# EAGLE board picoAvaR9 (EAGLE 6.1)
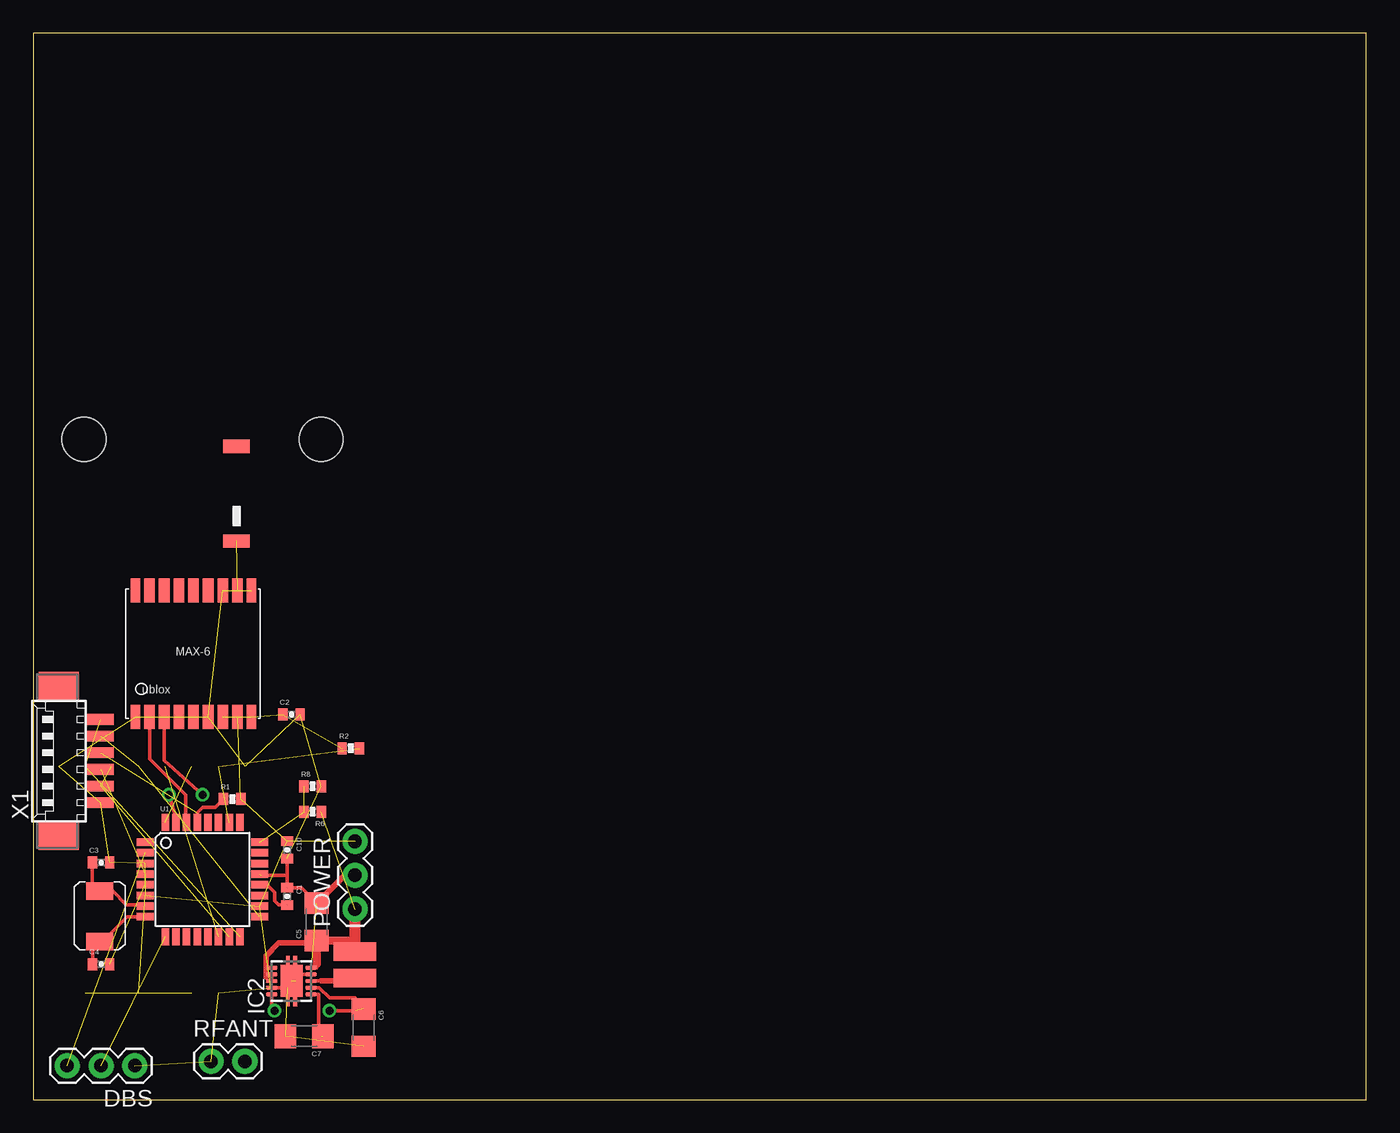
[diagram p0: board, top side]
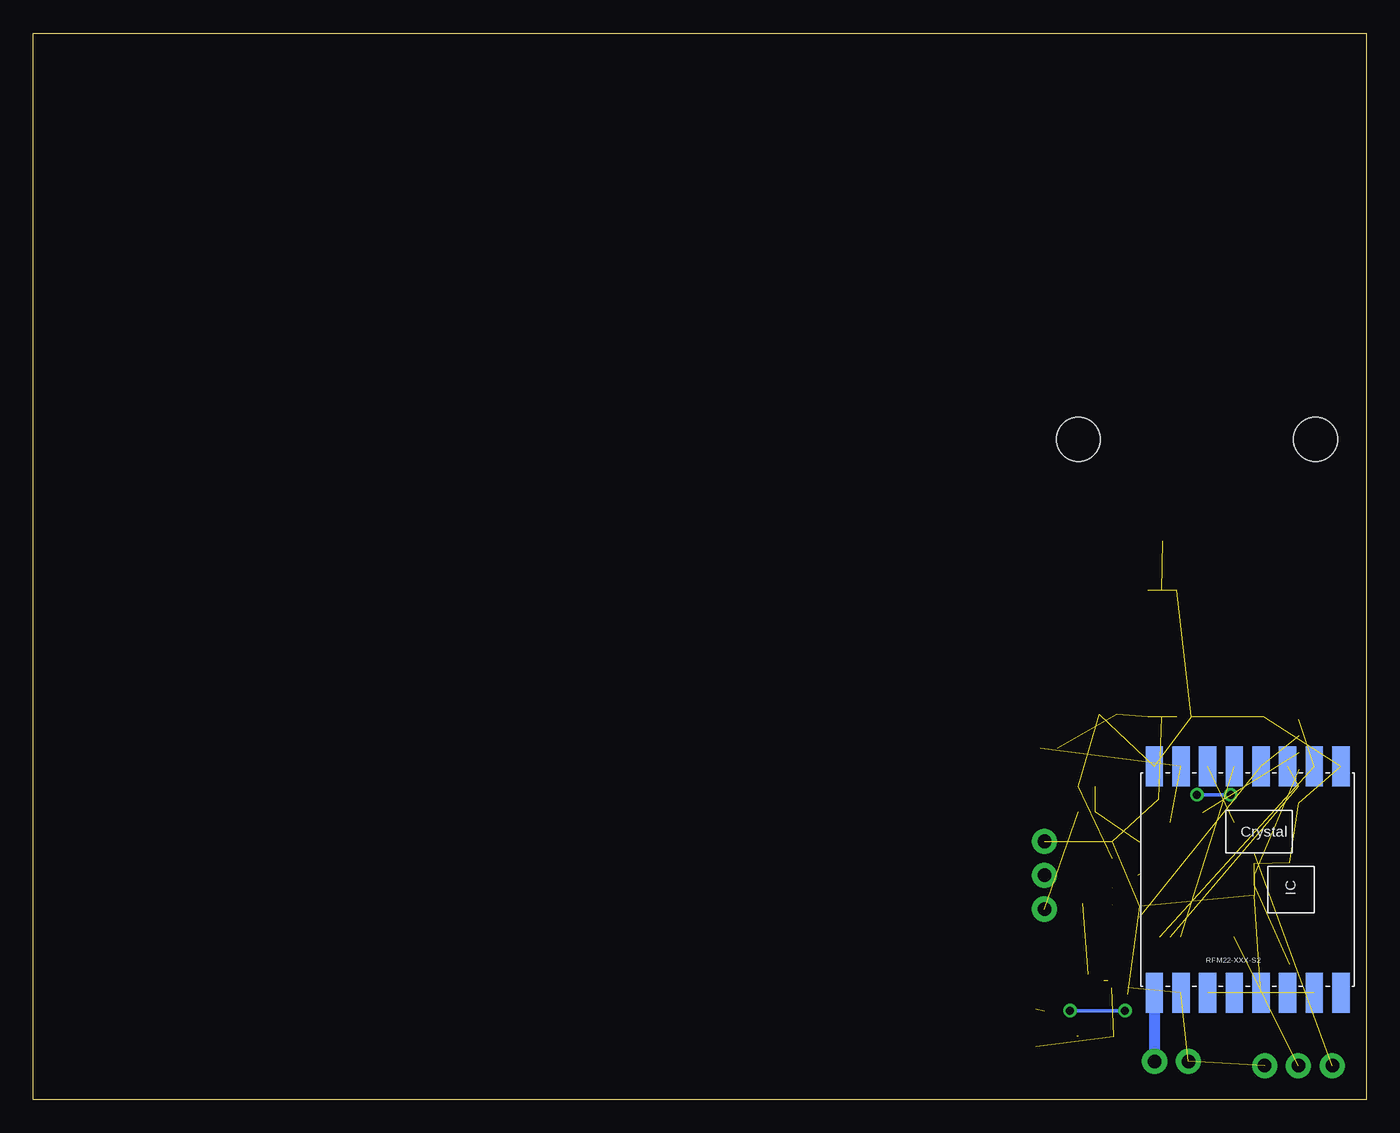
[diagram p1: board, bottom side, seen from below]

Size 100 x 80 mm. Coordinates in mm from the lower left corner, seen from the top.
Outline: 0,0 100,0 100,80 0,80 0,0
Copper layers (1*16): Top 0.035mm / dielectric 1.5mm / Bottom 0.035mm
Design rules: minimum track width 10mil, minimum drill 24mil, track to track 8mil, track to pad 8mil, pad to pad 8mil, via to via 8mil, smd to smd 8mil, copper to edge 40mil, drill to drill 8mil, minimum pad ring 10mil, minimum via ring 8mil, stop-mask expansion 4mil, vias tented up to drill 0mil, thermal gap 10mil
Net classes: 0 default: width 0.203 mm; 1 vcc: width 0.254 mm

## Footprints (pad centres in the part's own frame; a part is rotated, then mirrored left to right if it is on the bottom)
0402-CAP = smd 0.7 x 0.9: 1 -0.65,0; 2 0.65,0
1206 = smd 1.6 x 1.8: 1 -1.4,0; 2 1.4,0
1X03 = drill 1.016 pad 1.88: 1 0,0; 2 2.54,0; 3 5.08,0
S-PDSO-N10 = smd 0.28 x 0.85: 1 -1,-1.475; 2 -0.5,-1.475; 3 0,-1.475; 4 0.5,-1.475; 5 1,-1.475; 6 1,1.475; 7 0.5,1.475; 8 0,1.475; 9 -0.5,1.475; 10 -1,1.475 | smd 2.4 x 1.65: PP 0,0 | smd 3.8 x 0.28: PP@1 0,0.275; PP@2 0,-0.275
STAND-OFF = hole 3.302: 0,0
ELLVGG_INDUCTOR = smd 1.4 x 3.2: P$1 -3.81,0; P$2 -1.81,0
0402-RES = smd 0.7 x 0.9: 1 -0.65,0; 2 0.65,0
1X02 = drill 1.016 pad 1.88: 1 0,0; 2 2.54,0
RFM22-XXX-S2 = smd 3 x 1.3: 1 -8.5,7; 2 -8.5,5; 3 -8.5,3; 4 -8.5,1; 5 -8.5,-1; 6 -8.5,-3; 7 -8.5,-5; 8 -8.5,-7; 9 8.5,-7; 10 8.5,-5; 11 8.5,-3; 12 8.5,-1; 13 8.5,1; 14 8.5,3; 15 8.5,5; 16 8.5,7
TQFP32-08 = smd 1.27 x 0.559: 1 -4.293,2.8; 2 -4.293,2; 3 -4.293,1.2; 4 -4.293,0.4; 5 -4.293,-0.4; 6 -4.293,-1.2; 7 -4.293,-2; 8 -4.293,-2.8; 17 4.293,-2.8; 18 4.293,-2; 19 4.293,-1.2; 20 4.293,-0.4; 21 4.293,0.4; 22 4.293,1.2; 23 4.293,2; 24 4.293,2.8 | smd 0.559 x 1.27: 9 -2.8,-4.293; 10 -2,-4.293; 11 -1.2,-4.293; 12 -0.4,-4.293; 13 0.4,-4.293; 14 1.2,-4.293; 15 2,-4.293; 16 2.8,-4.293; 25 2.8,4.293; 26 2,4.293; 27 1.2,4.293; 28 0.4,4.293; 29 -0.4,4.293; 30 -1.2,4.293; 31 -2,4.293; 32 -2.8,4.293
UBLOX_MAX-6 = smd 1.8 x 0.7: 1_GND 4.95,-4.4; 9_V_RESET 4.95,4.3; 10_GND -4.55,4.3; 18_RESERVED -4.55,-4.4 | smd 1.8 x 0.8: 2_TXD1 4.95,-3.35; 3_RXD1 4.95,-2.25; 4_TIMEPULSE 4.95,-1.15; 5_EXTINT0 4.95,-0.05; 6_V_BCKP 4.95,1.05; 7_VCC_IO 4.95,2.15; 8_VCC 4.95,3.25; 11_RF_IN -4.55,3.25; 12_GND -4.55,2.15; 13_ANTON -4.55,1.05; 14_VCC_RF -4.55,-0.05; 15_RESERVED -4.55,-1.15; 16_SDA2 -4.55,-2.25; 17_SCL2 -4.55,-3.35
ABRACON_ABM3_CRYSTAL = smd 1.3 x 2: P$1 -3.4,0.1; P$2 0.4,0.1
JTI_ANTENNA-1575AT43A40 = smd 1 x 2: FEED -3.81,-1.27; NC 3.29,-1.27
53261-06 = smd 0.8 x 2: 1 3.125,-2.5; 2 1.875,-2.5; 3 0.625,-2.5; 4 -0.625,-2.5; 5 -1.875,-2.5; 6 -3.125,-2.5 | smd 2.1 x 3: S1 5.625,0.625; S2 -5.625,0.625

## Placement (x,y rotation side)
C1  0.1uF  [0402-CAP]  19.05,15.24 270 top
C2  0.1uF  [0402-CAP]  19.37,28.89 0 top
C3  18pF  [0402-CAP]  5.08,17.78 0 top
C4  18pF  [0402-CAP]  5.08,10.16 0 top
C5  10uF  [1206]  21.27,13.34 90 top
C6  10uF  [1206]  24.77,5.4 270 top
C7  10uF  [1206]  20.32,4.76 180 top
C10  0.1uF  [0402-CAP]  19.05,18.73 270 top
DBS  [1X03]  7.62,2.54 180 top
IC2  TPS61201  [S-PDSO-N10]  19.37,8.89 90 top
JP1  STAND-OFF  [STAND-OFF]  3.81,49.53 0 top
JP2  STAND-OFF  [STAND-OFF]  21.59,49.53 0 top
L1  2.2uH  [ELLVGG_INDUCTOR]  24.13,7.3 270 top
POWER  [1X03]  24.13,14.29 90 top
R1  10k  [0402-RES]  14.92,22.54 0 top
R2  10k  [0402-RES]  23.81,26.35 0 top
R6  100k  [0402-RES]  20.95,21.59 180 top
R8  10k  [0402-RES]  20.95,23.5 0 top
RFANT  [1X02]  13.34,2.86 0 top
RFM22-XXX-S2  RFM22  [RFM22-XXX-S2]  8.89,16.51 90 bottom
U1  ATMEGA328  [TQFP32-08]  12.7,16.51 0 top
U$1  UBLOX_MAX-6  [UBLOX_MAX-6]  12.06,33.66 270 top
U$2  ABRACON_ABM3_CRYSTAL  [ABRACON_ABM3_CRYSTAL]  5.08,15.24 90 top
U$3  JTI_ANTENNA-1575AT43A40  [JTI_ANTENNA-1575AT43A40]  13.97,45.72 90 top
X1  53261-06  [53261-06]  2.54,25.4 90 top

## Library data of the parts
C1-C7 C10 DBS JP1 JP2 POWER R1 R2 R6 R8 RFANT RFM22-XXX-S2 U1 = SparkFun
IC2 = texas; MPN: TPS61201DRCT; OC_FARNELL: unknown; OC_NEWARK: 37M0068
L1 U$1-U$3 = ava
X1 = con-molex; OC_FARNELL: 1125375; OC_NEWARK: unknown

## Nets
AREF: C1.2 U1.20
GND [vcc]: C1.1 C2.2 C3.2 C4.2 C5.2 C6.2 C7.2 C10.2 DBS.1 IC2.4 IC2.9 IC2.PP IC2.PP@1 IC2.PP@2 POWER.2 R8.2 RFANT.1 RFM22-XXX-S2.2 RFM22-XXX-S2.9 RFM22-XXX-S2.16 U1.3 U1.5 U1.21 U$1.1_GND U$1.6_V_BCKP U$1.10_GND U$1.12_GND X1.6
MISO: RFM22-XXX-S2.10 U1.16 X1.1
MOSI: RFM22-XXX-S2.11 U1.15 X1.5
N$3: RFANT.2 RFM22-XXX-S2.1
N$4: U$1.11_RF_IN U$3.FEED
N$5: RFM22-XXX-S2.3 RFM22-XXX-S2.7
N$6: RFM22-XXX-S2.4 RFM22-XXX-S2.6
N$7: IC2.3 L1.P$2
N$9: C3.1 U1.7 U$2.P$2
N$10: C4.1 U1.8 U$2.P$1
N$11: C7.1 IC2.1
NSS_RX: DBS.2 U1.9
NSS_TX: DBS.3 U1.2
RESET: R1.1 U1.29 X1.3
RFM22_NIRQ: RFM22-XXX-S2.14 U1.32
RFM22_NSEL: RFM22-XXX-S2.13 U1.14
RFM22_SDN: R2.2 RFM22-XXX-S2.15 U1.26
SCK: RFM22-XXX-S2.12 U1.17 X1.2
UBLOX_RXD: U1.31 U$1.3_RXD1
UBLOX_TXD: U1.30 U$1.2_TXD1
VBATT [vcc]: C5.1 IC2.5 IC2.6 IC2.7 IC2.8 L1.P$1 POWER.1 R6.1
VBATTADC: R6.2 R8.1 U1.24
VCC: C2.1 C6.1 C10.1 IC2.2 IC2.10 POWER.3 R1.2 R2.1 RFM22-XXX-S2.5 U1.4 U1.6 U1.18 U$1.7_VCC_IO U$1.8_VCC U$1.9_V_RESET X1.4

## Tracks (layer width: path | path; a pad name or v marks a point on that pad's centre or on a via)
AREF  (1 unrouted)
  Top 0.254: U1.20 17.55,16.11 18.1,15.56 18.1,14.92 18.41,14.61 19.05,14.61
GND  (23 unrouted)
  Top 0.254: IC2.4 19.68,9.39 19.68,8.89 | IC2.PP IC2.PP@1 19.09,8.39 IC2.9 | C10.2 19.05,16.83 | 19.05,16.83 19.05,15.88 20.13,15.88 C5.2 | 19.05,16.83 17.14,16.83
  Top 0.406: POWER.2 23.36,16.83 C5.2
MISO  (2 unrouted)
MOSI  (2 unrouted)
N$3
  Bottom 0.254: 15.88,8 RFM22-XXX-S2.1
  Bottom 0.813: RFANT.2 15.88,8
N$4  (1 unrouted)
N$5  (1 unrouted)
N$6  (1 unrouted)
N$7
  Top 0.254: IC2.3 21.59,8.89
  Top 0.406: 24.13,9.21 L1.P$2 24.13,8.89 21.59,8.89
N$9
  Top 0.254: U1.7 8.31,14.61 6.99,14.61 5.95,15.64 U$2.P$2 4.9,15.56 4.45,15.56 4.43,15.57 C3.1
N$10
  Top 0.254: U1.8 7.04,13.71 5.08,11.75 5.07,11.75 U$2.P$1 4.54,11.84 4.45,11.75 4.45,10.18 C4.1
N$11  (1 unrouted)
  Top 0.254: IC2.1 21.4,7.89 21.4,4.89 21.27,4.76 21.59,4.76
NSS_RX  (1 unrouted)
NSS_TX  (1 unrouted)
RESET  (1 unrouted)
  Top 0.254: U1.29 12.3,21.51 12.7,21.91 13.64,21.91 R1.1
RFM22_NIRQ  (1 unrouted)
RFM22_NSEL  (1 unrouted)
RFM22_SDN  (2 unrouted)
SCK  (2 unrouted)
UBLOX_RXD  (via drill 0.6)
  Top 0.254: U$1.3_RXD1 9.81,25.43 v12.7,22.86 | v10.16,22.86 10.79,20.9 U1.31
  Bottom 0.254: v12.7,22.86 v10.16,22.86
UBLOX_TXD
  Top 0.254: U$1.2_TXD1 8.71,25.57 11.43,22.86 11.43,20.73 | 11.43,20.64 11.43,20.73 | 11.43,20.73 U1.30
VBATT  (1 unrouted)
  Top 0.254: 21.27,10.16 21.27,9.89 IC2.5 21,9.89 21.27,10.16 | 21.27,10.16 21.27,11.43 20.95,11.75 | 17.46,9.21 17.71,9.21 IC2.7 IC2.8 | IC2.6 17.51,9.89 17.46,9.84
  Top 0.406: 20.95,11.75 18.41,11.75 17.46,10.79 17.46,9.84 17.46,9.21
  Top 0.61: 21.27,10.16 C5.1 24.13,11.94 L1.P$1
  Top 0.813: L1.P$1 POWER.1
VBATTADC  (2 unrouted)
VCC  (via drill 0.6)  (14 unrouted)
  Top 0.254: IC2.10 17.89,6.87 v18.1,6.67 | v22.23,6.67 24.13,6.67 24.13,7.62 22.23,7.62 21.45,8.39 IC2.2
  Bottom 0.254: v18.1,6.67 v22.23,6.67